# Altium PCB PCB2.PcbDoc
Units mil, origin at the board's own origin, x right, y up, seen from the top; angles counter-clockwise.
Board outline 3892.5 x 3160 mil, 2 copper layers (Top Layer, Bottom Layer); 68 components, 77 nets, 271 pads, 94 vias.
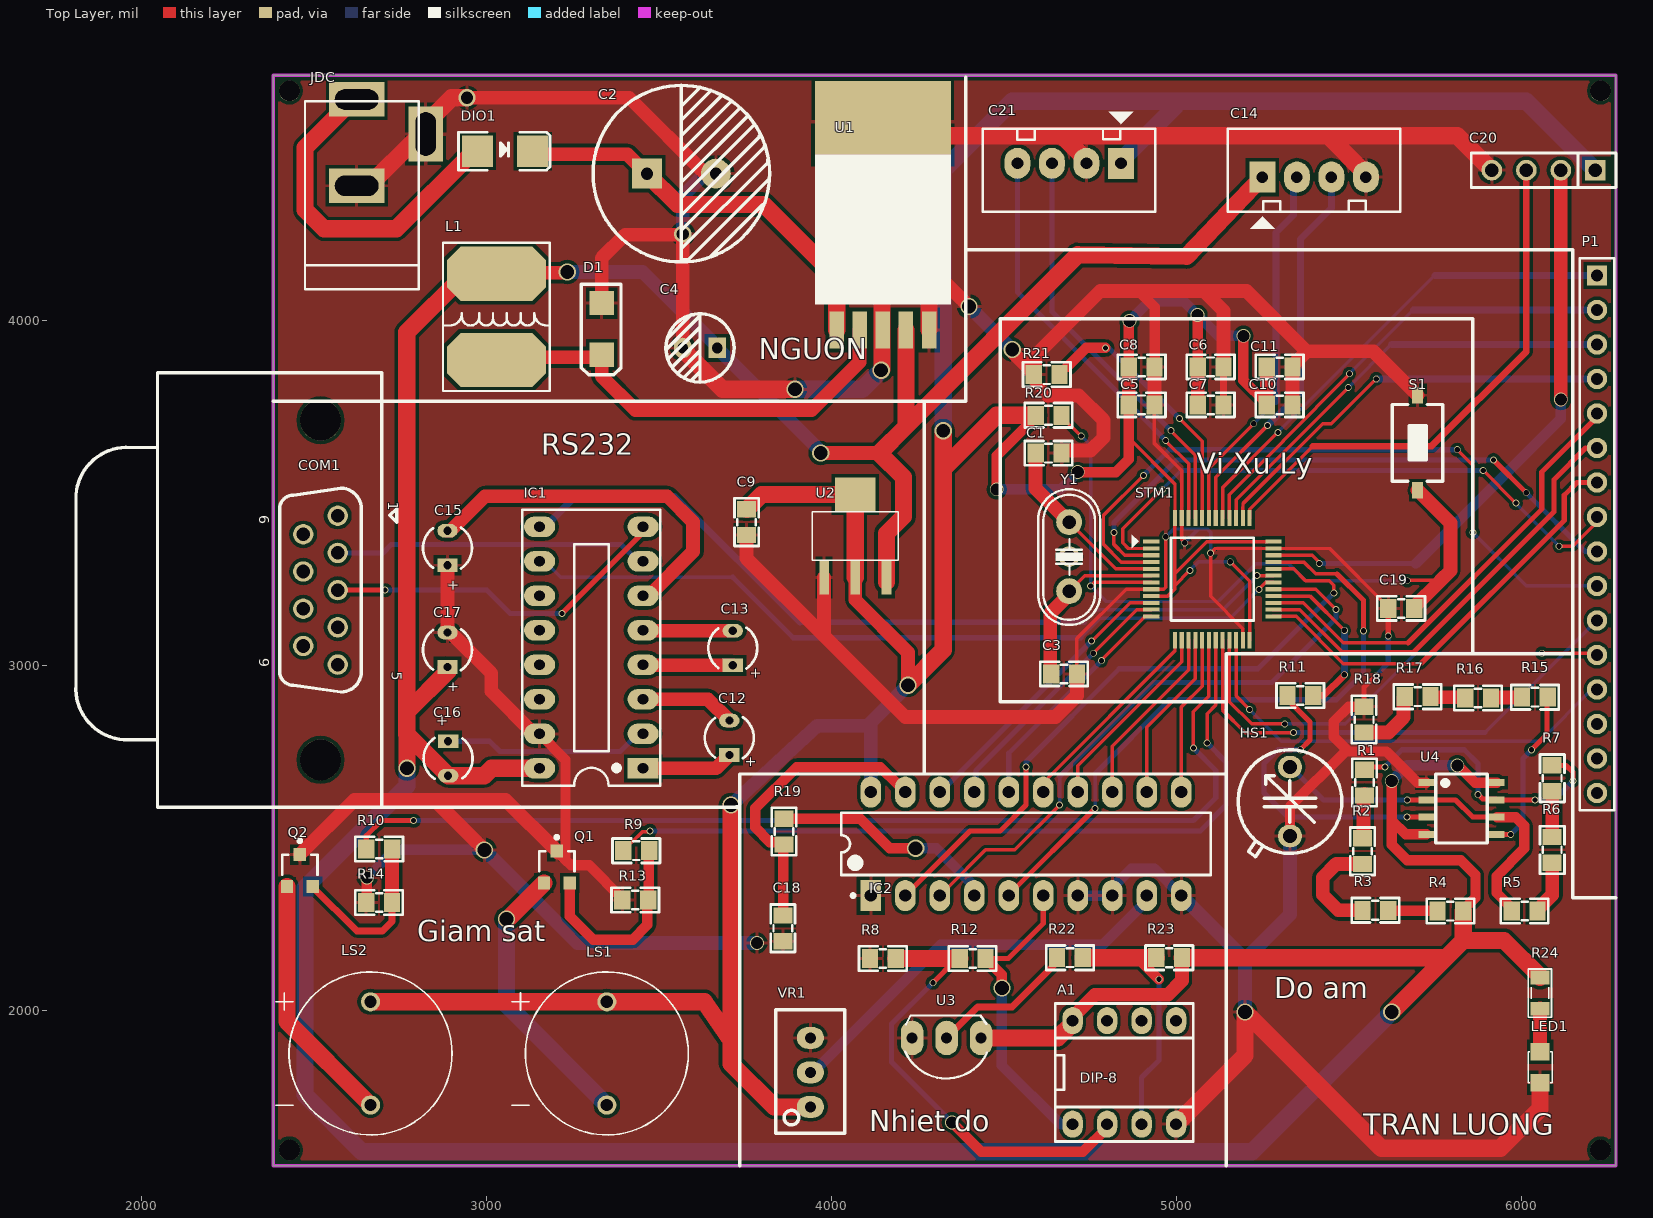
[diagram p0: Top Layer view]
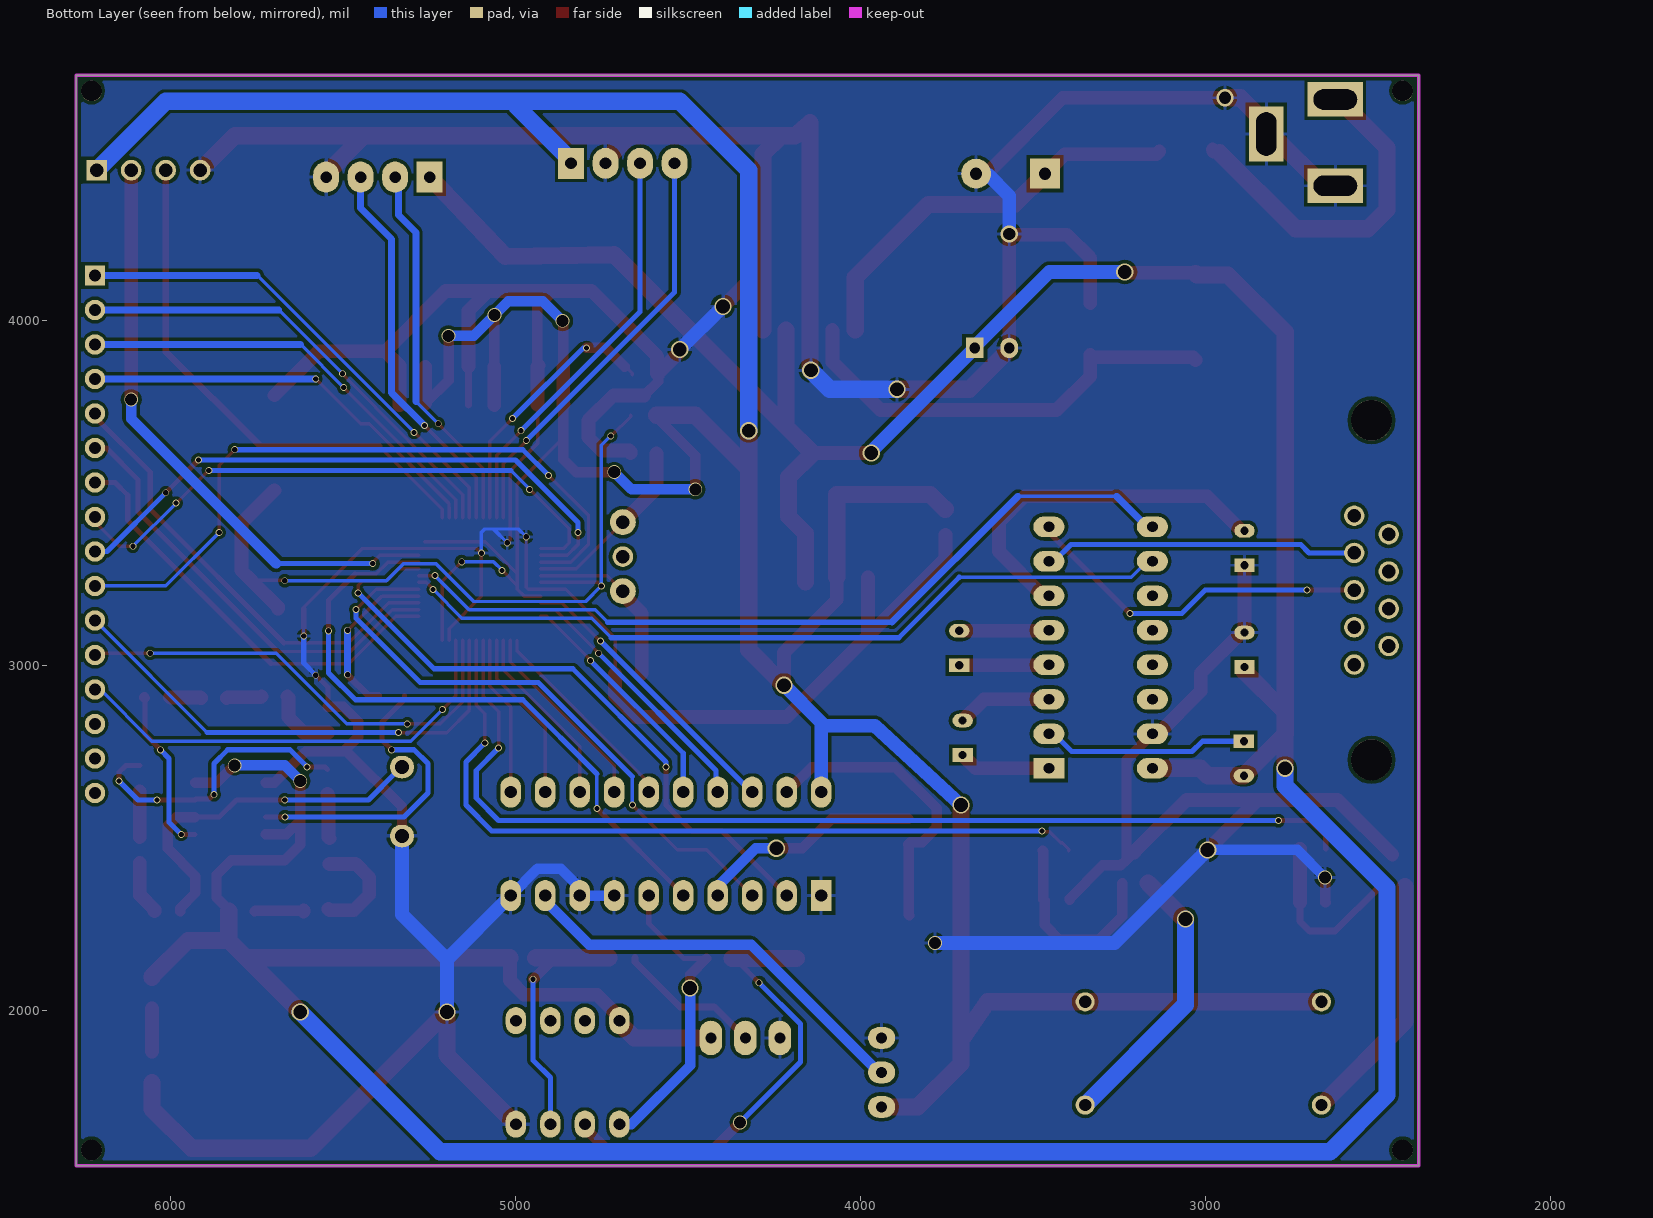
[diagram p1: Bottom Layer view, seen from below]
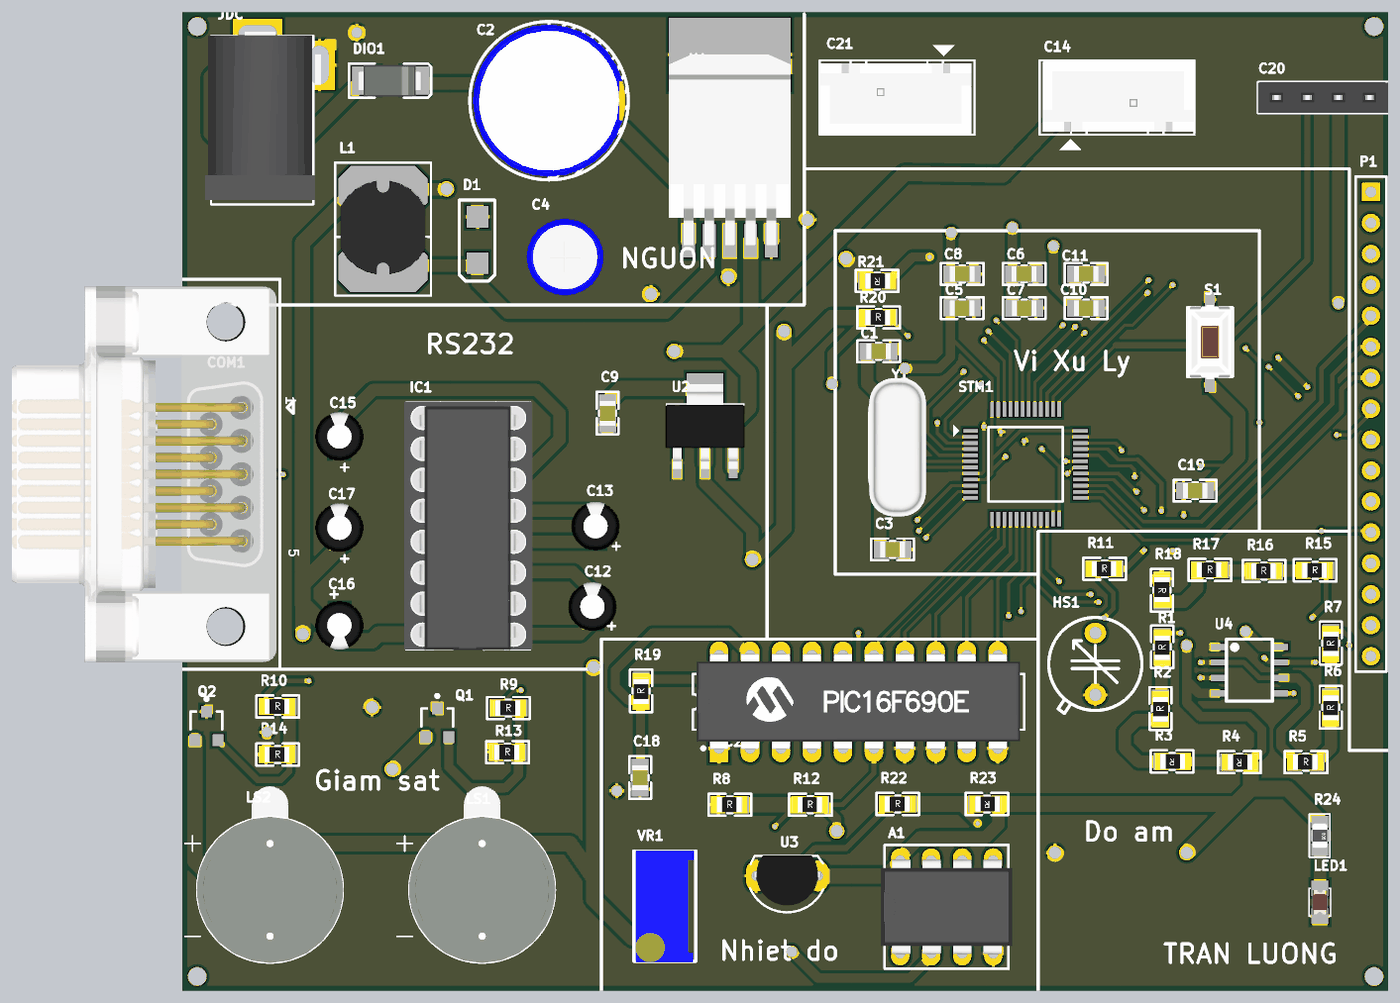
[diagram p2: 3D render of the assembled board from above, using the file's embedded part models]

## Layer stack, top to bottom
Top Solder: solder mask 0.4, Solder Resist, Dk 3.5
Top Layer: signal copper 1.4
Dielectric 1: dielectric 12.6, FR-4, Dk 4.8
Bottom Layer: signal copper 1.4
Bottom Solder: solder mask 0.4, Solder Resist, Dk 3.5

## Board outline
2382.5,1550 2382.5,4710 6275,4710 6275,1550

## Design rules (kind name [scope] priority, off if disabled: settings)
Clearance [All] p1: gap=10 ignorepadtopadclearanceinfootprint=TRUE
PolygonConnect [All] p1: connectstyle=Relief reliefconductorwidth=10 reliefentries=4 polygonreliefangle="90 Angle" airgapwidth=10
RoutingVias [All] p1: holewidth=35 width=40 viastyle="Through Hole" minholewidth=15 minwidth=20 maxholewidth=40 maxwidth=50
SolderMaskExpansion [All] p1: expansion=4
Width [All] p1: maxlimit=50 minlimit=15 preferedwidth=30
30 further rules are at their usual default settings.

## Components (designator, comment, footprint, x,y, rotation, side; value= is the part's Value field where it differs from the comment)
A1 "LM358 SOP8" DIP8 4850,1820 r0 top
C1 "22pF" "tu 0805" 4630,3615 r0 top
C2 "680uF" "tu hoa 13mm" 3566.1,4425 r0 top
C3 "22pF" "tu 0805" 4675,2975 r0 top
C4 "220uF" "Tu hoa 5mm" 3620,3920 r180 top
C5 "100pF" "Tu 0805" 4900,3755 r180 top
C6 "100pF" "Tu 0805" 5100,3865.13 r180 top
C7 "100pF" "Tu 0805" 5100,3755 r0 top
C8 "4.7uF" "Tu 0805" 4900,3865.13 r0 top
C9 "104" "tu 0805" 3755,3415 r270 top
C10 "1uF" "tu 0805" 5300,3755 r0 top
C11 "10nF" "tu 0805" 5300,3865.13 r0 top
C12 "10uF/50V" C3MM 3705,2790 r90 top
C13 "10uF/50V" C3MM 3715,3050 r90 top
C14 "JP4" Header4 5250,4415 r0 top
C15 "10uF/50V" C3MM 2888.01,3340 r90 top
C16 "10uF/50V" C3MM 2890,2730 r270 top
C17 "10uF/50V" C3MM 2888.01,3045 r90 top
C18 "150pF" "tu 0805" 3860.13,2237.77 r270 top
C19 "100nF" "tu 0805" 5652.23,3165 r0 top
C20 "JP4" JP4-C1T 6215,4435 r180 top
C21 "JP4" Header4 4840,4455 r180 top
COM1 "COM 9 FMALE" COM9A 2520,3217.87 r270 top value="COM 9"
D1 "Diode Zener" SMA 3335,3975 r90 top
DIO1 "Diode SMD" DIO-SMD-106 3055,4490 r180 top value=1N5007
HS1 "C1815 SOT23 TRANS NPN 0.15A 50V (SMD-HF)" "Cam Bien HS1101" 5330,2605 r90 top value="C?m Bi?n Ð? ?m HS1101"
IC1 "MAX232" DIP16/W0.3 3455,2701.38 r90 top
IC2 "ADC0804LCN" DIP20/W0.3 4565,2482.43 r0 top
JDC "3CELL_12V" DC-IN 2725,4515 r90 top
L1 "33uH" "Cuon Cam 7.5x7x5" 3030,3860 r0 top
LED1 "LED" LED-0805-Red 6055,1880 r270 top value="LED 3 ly Single Colour"
LS1 "BUZZER_T" XDCR_AI-1224-TWT-5V-R 3350,1875 r0 top
LS2 "BUZZER_T" XDCR_AI-1224-TWT-5V-R 2665,1875 r0 top
P1 "Header 16" HDR1X16 6220,4130 r270 top
Q1 "2N222" SOT23 3205,2415 r0 top value=C1815
Q2 "2N222" SOT23 2460,2405 r0 top value=C1815
R1 "9.1k" "Tro SMD 0805" 5543.62,2660 r90 top
R2 "6.8k" "Tro SMD 0805" 5537.61,2461.17 r90 top
R3 "10k" "Tro SMD 0805" 5577.77,2287.61 r180 top
R4 "24k" "tro smd 0805" 5795,2285 r180 top
R5 "270k" "tro smd 0805" 6010,2290 r0 top
R6 "270k" "tro smd 0805" 6087.61,2465 r90 top
R7 "36k" "tro smd 0805" 6087.61,2672.43 r90 top
R8 "10k" "tro smd 0805" 4150,2152.39 r0 top
R9 "1k" "tro smd 0805" 3435,2465 r0 top
R10 "1k" "tro smd 0805" 2690,2470 r0 top
R11 "1k" "tro smd 0805" 5360,2915 r0 top
R12 "10k" "tro smd 0805" 4410,2152.61 r0 top
R13 "10k" "tro smd 0805" 3432.23,2322.39 r0 top
R14 "10k" "tro smd 0805" 2689.65,2314.79 r0 top
R15 "360k" "Tro SMD 0805" 6040,2910 r0 top
R16 "360k" "Tro SMD 0805" 5875,2907.61 r0 top
R17 "150k" "Tro SMD 0805" 5700,2911.54 r0 top
R18 "39k" "tro smd 0805" 5547.39,2842.77 r270 top
R19 "10k" "tro smd 0805" 3860.74,2518.09 r90 top
R20 "10k" "tro smd 0805" 4630,3727.13 r0 top
R21 "100k" "tro smd 0805" 4625,3840 r180 top
R22 "10k" "tro smd 0805" 4692.23,2155 r0 top
R23 "10k" "tro smd 0805" 4980,2150 r180 top
R24 "1k" RES-SMD-0805 6055,2050 r270 top
S1 "SW-SMD" SW-SMD 5700,3645 r270 top
STM1 "STM32F103C8T6" QFP50P900X900X160-48N 5105,3250 r0 top
U1 "LM2596" TO263-5 4150,3973.07 r0 top
U2 "LM1117-ADJ" LM1117-SOP 4070,3305 r0 top
U3 "LM35" QTO-92 4335,1920 r180 top
U4 "MH001514" "sop 8" 5725,2460 r270 top value="NE555 SOP8"
VR1 "10k" VAR_RESISTOR 3940,1820 r90 top value="VR 10K"
Y1 "8MHz" "THACH ANH CAM" 4690,3315 r90 top

## Footprints (in the part's own frame and the unit in brackets; to place one, negate y for a bottom-side part, rotate by r counter-clockwise, add the part's x,y. Pads: shape width x height; smd on the part's side, far side on the other; paste and mask are expansions set on the pad)
C3MM [mm]
  rect 1x1.5 hole 0.6: 1(-1.27,0)
  oval 1x1.5 hole 0.6: 2(1.27,0)
  silkscreen extent -1.5,-1.81 1.5,1.8, body extent -2,-2.03 1.99,1.97, height 7.01
"Cam Bien HS1101" [mil]
  oval 65x70 hole 40: 1(-100,0) 2(100,0)
  silkscreen extent -160,-150 150,150
COM9A [mm] "D-SUB- 9P, MALE, RT ANGLE, TH"
  round 1.5 hole 1 unplated: 1(-5.48,1.27) 2(-2.74,1.27) 3(0,1.27) 4(2.74,1.27) 5(5.48,1.27) 6(-4.11,-1.27) 7(-1.37,-1.27) 8(1.37,-1.27) 9(4.11,-1.27)
  round 3 hole 3 unplated: 10(-12.5,0) 11(12.5,0)
  silkscreen extent -16,-18.01 16,5.6, body extent -15.4,-17.5 15.4,4.2, height 13.2
"Cuon Cam 7.5x7x5" [mm]
  oct 7.3x4 smd: 1(0,0.635) 2(0,6.985)
  silkscreen extent -3.94,-1.65 3.94,9.27, body extent -3.5,0.07 3.5,7.8, height 5.02
DC-IN [mil] "Jac DC input"
  rect 100x160 hole 59.06 slot 125.98 at 90 deg: 1(125,100) 2(-125,100)
  rect 160x100 hole 59.06 slot 125.98 at 0 deg: 3(25,-100)
  silkscreen extent -425,-80 120,250, body extent -410,-105 134,269, height 434
DIO-SMD-106 [mil]
  rect 90x90.55 smd: 1(80,0) 2(-80,0)
  silkscreen extent -130,-55 135,55, body extent -99,-50 106,52, height 95
DIP8 [mm] "W.300/L.400"
  oval 1.5x2 hole 0.864: 1(-3.81,-3.81) 2(-1.27,-3.81) 3(1.27,-3.81) 4(3.81,-3.81) 5(3.81,3.81) 6(1.27,3.81) 7(-1.27,3.81) 8(-3.81,3.81)
  silkscreen extent -5.08,-5.08 5.08,5.08, body extent -5.4,-3.88 5.4,3.88, height 4.5
DIP16/W0.3 [mil] "16 PIN, W 300mil, Pin to pin 100mil"
  rect 60x90 hole 31: 1(0,0)
  oval 60x90 hole 31: 2(100,0) 3(200,0) 4(300,0) 5(400,0) 6(500,0) 7(600,0) 8(700,0) 9(700,300) 10(600,300) 11(500,300) 12(400,300) 13(300,300) 14(200,300) 15(100,300) 16(0,300)
  silkscreen extent -50,-50 750,350, body extent -52,-57 752,356, height 299
DIP20/W0.3 [mil] "DIP, 20-Leads, Row Spacing 7.62mm, Pitch 2.54mm, Body 25.9x6.6mm"
  rect 60x90 hole 35.43: 1(-450,-150)
  oval 60x90 hole 35.43: 2(-350,-150) 3(-250,-150) 4(-150,-150) 5(-50,-150) 6(50,-150) 7(150,-150) 8(250,-150) 9(350,-150) 10(450,-150) 11(450,150) 12(350,150) 13(250,150) 14(150,150) 15(50,150) 16(-50,150) 17(-150,150) 18(-250,150) 19(-350,150) 20(-450,150)
  silkscreen extent -535,-155 535,90, body extent -522,-153 522,155, height 180
HDR1X16 [mm] "Connector; Header; 16 Position"
  rect 1.5x1.5 hole 0.9: 1(0,0)
  round 1.5 hole 0.9: 2(2.54,0) 3(5.08,0) 4(7.62,0) 5(10.16,0) 6(12.7,0) 7(15.24,0) 8(17.78,0) 9(20.32,0) 10(22.86,0) 11(25.4,0) 12(27.94,0) 13(30.48,0) 14(33.02,0) 15(35.56,0) 16(38.1,0)
  silkscreen extent -1.27,-1.27 39.37,1.27, body extent -1.27,-1.27 39.37,1.27, height 7
Header4 [mil] "CON4"
  rect 75x90 hole 34: 1(0,0)
  oval 75x90 hole 34: 2(100,0) 3(200,0) 4(300,0)
  silkscreen extent -100,-150 400,140, body extent -90,-90 398,136, height 276
JP4-C1T [mm] "4 row, straight, gold plating"
  rect 1.52x1.52 hole 1.02: 1(0,0)
  round 1.52 hole 1.02: 2(2.54,0) 3(5.08,0) 4(7.62,0)
  silkscreen extent -1.52,-1.27 9.14,1.27, body extent -1.52,-1.25 9.14,1.25, height 8.51
LED-0805-Red [mil]
  rect 50x55 smd: 1(0,0) 2(90,0)
  silkscreen extent 0,-35 90,35, body extent 5,-25 85,25, height 43
LM1117-SOP [mm]
  rect 0.7x2.54 smd: 1(-2.3,-1.27) 2(0,-1.27) 3(2.3,-1.27)
  rect 3x2.54 smd: 2(0,4.826)
  silkscreen extent -3.17,0 3.17,3.56, body extent -3.25,-1.78 3.25,5.18, height 1.68
QFP50P900X900X160-48N [mm] "QFP,0.50mm pitch,square;12 pin X 12 pin,7.00mm X 7.00mm X 1.60mm H body"
  rect 1.2x0.3 smd: 1(-4.5,2.75) 2(-4.5,2.25) 3(-4.5,1.75) 4(-4.5,1.25) 5(-4.5,0.75) 6(-4.5,0.25) 7(-4.5,-0.25) 8(-4.5,-0.75) 9(-4.5,-1.25) 10(-4.5,-1.75) 11(-4.5,-2.25) 12(-4.5,-2.75) 25(4.5,-2.75) 26(4.5,-2.25) 27(4.5,-1.75) 28(4.5,-1.25) 29(4.5,-0.75) 30(4.5,-0.25) 31(4.5,0.25) 32(4.5,0.75) 33(4.5,1.25) 34(4.5,1.75) 35(4.5,2.25) 36(4.5,2.75)
  rect 0.3x1.2 smd: 13(-2.75,-4.5) 14(-2.25,-4.5) 15(-1.75,-4.5) 16(-1.25,-4.5) 17(-0.75,-4.5) 18(-0.25,-4.5) 19(0.25,-4.5) 20(0.75,-4.5) 21(1.25,-4.5) 22(1.75,-4.5) 23(2.25,-4.5) 24(2.75,-4.5) 37(2.75,4.5) 38(2.25,4.5) 39(1.75,4.5) 40(1.25,4.5) 41(0.75,4.5) 42(0.25,4.5) 43(-0.25,4.5) 44(-0.75,4.5) 45(-1.25,4.5) 46(-1.75,4.5) 47(-2.25,4.5) 48(-2.75,4.5)
  silkscreen extent -5.94,-3.05 3.05,3.28, body extent -4.5,-4.5 4.5,4.5, height 1.42
QTO-92 [mil] "TO-92"
  oval 66x100 hole 32: 1(-100,0) 2(0,0) 3(100,0)
  silkscreen extent -117,-65 120,118, body extent -109,-66 109,95, height 245
RES-SMD-0805 [mil]
  rect 39.37x55 smd: 1(-45,0) 2(45,0)
  silkscreen extent -70,-34 70,33, body extent -39,-25 39,25, height 31
SMA [mil]
  rect 70x70 smd: 1(74.8,0) 2(-74.8,0)
  silkscreen extent -133,-56 129,59
"sop 8" [mil]
  rect 20x45 smd: 1(-200,0) 2(-150,0) 3(-100,0) 4(-50,0) 5(-50,205) 6(-100,205) 7(-150,205) 8(-200,205)
  silkscreen extent -225,28 -25,177
SOT23 [mm] "SOT-23; 3 Leads; Body 3.1 x 2.5 mm, inc. leads (LxW max), Alternate Lead Configuration"
  rect 0.9x0.95 smd: 1(0,1.175) 2(0.95,-1.175) 3(-0.95,-1.175)
  silkscreen extent -1.3,-0.3 1.3,2.32
SW-SMD [mm] "Switch SMD type"
  rect 1.2x0.8 smd: 1(-3.5,0) 2(3.5,0)
  silkscreen extent -2.82,-1.85 2.82,1.85, body extent -3.05,-1.85 3.05,1.85, height 2.5
"THACH ANH CAM" [mm] "Footpin for Crystal 2 pin"
  round 1.524 hole 1: 0(0,0)
  round 1.905 hole 1: 1(-2.54,0) 2(2.54,0)
  silkscreen extent -5.03,-2.29 4.96,2.29, body extent -5.93,-2.36 5.42,2.29, height 3.5
TO263-5 [mm] "LM2576-SMD"
  rect 1.07x2.75 smd: 1(-3.4,-0.025) 2(-1.7,-0.025) 3(0,-0.025) 4(1.7,-0.025) 5(3.4,-0.025)
  rect 10x6 smd: 1(0,15.289)
  silkscreen extent -5,1.85 5,12.88, body extent -5,-0.38 5,15.29, height 4.79
"Tro SMD 0805" [mm]
  rect 1.2x1.4 smd: 1(-0.946,-0.061) 2(0.954,-0.061)
  silkscreen extent -1.75,-0.97 1.75,0.84, body extent -1.56,-0.76 1.44,0.64, height 0.53
"tro smd 0805" [mm]
  rect 1.2x1.4 smd: 1(-0.946,-0.061) 2(0.954,-0.061)
  silkscreen extent -1.75,-0.97 1.75,0.84, body extent -1.56,-0.76 1.44,0.64, height 0.53
"tu 0805" [mm] "Compoment SMD 80x50mil"
  rect 1.2x1.4 smd: 1(-0.946,-0.003) 2(0.954,-0.003)
  silkscreen extent -1.75,-0.89 1.75,0.89, body extent -1.01,-0.64 1.01,0.63, height 0.61
"Tu 0805" [mm] "Compoment SMD 80x50mil"
  rect 1.2x1.4 smd: 1(-0.946,-0.003) 2(0.954,-0.003)
  silkscreen extent -1.75,-0.89 1.75,0.89, body extent -1.01,-0.64 1.01,0.63, height 0.61
"Tu hoa 5mm" [mm]
  rect 1.3x1.5 hole 0.8: 1(-1.27,0)
  oval 1.3x1.5 hole 0.8: 2(1.27,0)
  silkscreen extent -2.51,-2.51 2.51,2.51, body extent -3.12,-3.18 3.23,3.18, height 14.55
"tu hoa 13mm" [mm]
  rect 2.2x2.2 hole 0.9: 1(-2.54,0)
  round 2.2 hole 0.9: 2(2.54,0)
  silkscreen extent -6.5,-6.5 6.5,6.5, body extent -6.25,-6.25 6.26,6.25, height 23.02
VAR_RESISTOR [mm]
  oval 1.6x2 hole 0.8: 1(-2.54,0) 2(0,0) 3(2.54,0)
  silkscreen extent -4.47,-2.54 4.6,2.54, body extent -4.54,-2.4 4.66,2.4, height 12.02
XDCR_AI-1224-TWT-5V-R [mm]
  round 1.408 hole 0.9: N(0,-3.8) P(0,3.8)
  silkscreen extent -6.98,-6 6,6, body extent -6,-6 6,8.5, height 13

## Part data
A1: library part LM358, "Dán", Chung_Loai=Dán, Don_Vi=Con, Ma_Hang=MH000609, Ten_Linh_Kien="LM358 SOP8"
C1 C3: library part "Tu 0805 22pF 50V 10%", "Dán", Chung_Loai=Dán, Don_Vi=Con, Ma_Hang=MH004560, So_Chan=2, Ten_Linh_Kien="T? 0805 22P 10% 50V"
C2: library part "Tu Hoa 680uF 25V 13x17", "C?m", Chung_Loai=C?m, Don_Vi=Con, Ma_Hang=MH005082, So_Chan=2, Ten_Linh_Kien="T? Hóa 680uF 25V"
C4: library part "Tu Hoa 220uF 16V 6x11", "C?m", Chung_Loai=C?m, Don_Vi=Con, Ma_Hang=MH001348, So_Chan=2, Ten_Linh_Kien="T? Hóa 220uF 16V 6x11MM"
C5 C6 C7 C8: library part "Tu 0805 200pF 50V 10%", "Dán", Chung_Loai=Dán, Don_Vi=Con, Ma_Hang=MH008100, So_Chan=2, Ten_Linh_Kien="T? 0805 200p 10% 50V"
C9: library part "Tu 0805 104 50V 10%", "Dán", Chung_Loai=Dán, Don_Vi=Con, Ma_Hang=MH004551, So_Chan=2, Ten_Linh_Kien="T? 0805 104-100nF 10% 50V"
C10 C11 C19: library part "Tu 0805 474 50V 10%", "Dán", Chung_Loai=Dán, Don_Vi=Con, Ma_Hang=MH006116, So_Chan=2, Ten_Linh_Kien="T? 0805 474-470nF 50V 10%"
C12 C13 C15 C16 C17: library part "Cap Pol", "Polarized Capacitor (Axial)", LatestRevisionDate=17-Jul-2002, LatestRevisionNote="Re-released for DXP Platform.", PackageReference=POLAR0.8, Published=8-Jun-2000, Publisher="Altium Limited"
C14 C20 C21: "WR-PHD 2.54 mm Angled Socket Header", Manufacturer="W¨¹rth Elektronik eiSos GmbH", partNo=613004143121, ComponentLink1 Description=Manufacturer, ComponentLink1URL=http://www.we-online.com, ComponentLink2 Description=Datasheet, ComponentLink2URL=http://katalog.we-online.de/em/datasheet/6130xx143121.pdf, Created by="Karrer Zheng", Created Date="29 March 2013", NoPins=04
C18: library part "Tu 0805 220nF 50V 10%", "Dán", Chung_Loai=Dán, Don_Vi=Con, Ma_Hang=MH008099, So_Chan=2, Ten_Linh_Kien="T? 0805 220nF 50V 10%"
COM1: library part COM9F, "COM 9", PackageDocument=O, DatasheetDocument=1-Sep-1999, Gender=Receptacle, LatestRevisionDate=17-Jul-2002, LatestRevisionNote="Re-released for DXP Platform.", Orientation="Right Angle", PackageReference=788750, Positions=9, Published=15-Jun-2001, Publisher="Altium Limited"
D1: "Zener Diode", LatestRevisionDate=17-Jul-2002, LatestRevisionNote="Re-released for DXP Platform.", PackageReference=DIODE-0.7, Published=8-Jun-2000, Publisher="Altium Limited"
DIO1: "Default Diode", Code - JEDEC=DO-214-AB, Published=8-Jun-2000, Publisher="Altium Limited", Revision="July-2002: Re-released for DXP Platform."
HS1: library part "Cam Bien HS1101", "C?m"
IC1: "Dual EIA-232 Driver/Receiver"
IC2: library part ADC0804, "C?m", Chung_Loai=C?m, Don_Vi=Con, Ma_Hang=MH002626, Ten_Linh_Kien="ADC0804LCN DIP20"
JDC: library part Jac_DC, "C?m", Chung_Loai=C?m, Don_Vi=Con, Ma_Hang=MH000923, Ten_Linh_Kien="Jack DC5.5x2.1MM DC5501"
L1: library part "CUON CAM 47uH_ SMD", "Dán", Chung_Loai=Dán, Don_Vi=Con, Ma_Hang=MH004211, Ten_Linh_Kien="Cu?n C?m 47uH 7x7x4MM CD74R"
LED1: "LED Single colour Green and Red"
LS1 LS2: library part AI-1224-TWT-5V-R, "AUDIO INDICATOR 5VDC 30MA 85DB", Package="PUI Audio, Inc.", Availability="In Stock", Check_prices=https://www.snapeda.com/parts/AI-1224-TWT-5V-R/PUI%20Audio,%20Inc./view-part/5873694/?ref=eda, MF="PUI Audio, Inc.", MP=AI-1224-TWT-5V-R, Price=None, Purchase-URL=https://pricing.snapeda.com/search/part/AI-1224-TWT-5V-R/?ref=eda, SnapEDA_Link=https://www.snapeda.com/parts/AI-1224-TWT-5V-R/PUI%20Audio,%20Inc./view-part/5873694/?ref=snap
P1: "Header, 16-Pin", LatestRevisionDate=17-Jul-2002, LatestRevisionNote="Re-released for DXP Platform.", Publisher="Altium Limited"
Q1 Q2: "NPN 600mW, ECB", =C2383
R1 R2 R3 R15 R16 R17: library part "Tro 0805 5% 270k", "Dán", Chung_Loai=Dán, Don_Vi=Con, Ma_Hang=MH005333, So_Chan=2, Ten_Linh_Kien="Tr? 0805 5% 270k"
R4 R18: library part "Tro 0805 5% 1M", "Dán", Chung_Loai=Dán, Don_Vi=Con, Ma_Hang=MH005235, So_Chan=2, Ten_Linh_Kien="Tr? 0805 5% 1M"
R5 R6 R7: library part "Tro 0805 1% 15k", "Dán", Chung_Loai=Dán, Don_Vi=Con, Ma_Hang=MH005476, So_Chan=2, Ten_Linh_Kien="Tr? 0805 1% 15k"
R8 R12 R19 R22 R23: library part "Tro 0805 5% 10k", "Dán", Chung_Loai=Dán, Don_Vi=Con, Ma_Hang=MH005239, So_Chan=2, Ten_Linh_Kien="Tr? 0805 5% 10k"
R9 R10 R11 R20 R21: library part "Tro 0805 1% 1k", "Dán", Chung_Loai=Dán, Don_Vi=Con, Ma_Hang=MH005468, So_Chan=2, Ten_Linh_Kien="Tr? 0805 1% 1k"
R13 R14: library part "Tro 0805 1% 10k", "Dán", Chung_Loai=Dán, Don_Vi=Con, Ma_Hang=MH005473, So_Chan=2, Ten_Linh_Kien="Tr? 0805 1% 10k"
R24: library part "Resistor - SMD", "Resistor", Manufacturer="Generic Components", Class=Passive, Published=08/06/2000, Publisher="Altium Hobart Technology Centre"
S1: "Switch", LatestRevisionDate=17-Jul-2002, LatestRevisionNote="Re-released for DXP Platform.", PackageReference=SPST-2, Published=24-Mar-1999, Publisher="Altium Limited"
STM1: "Dán", Chung_Loai=Dán, Don_Vi=Con, Ma_Hang=MH000567, Ten_Linh_Kien=STM32F103C8T6
U1: Max Input Voltage="12 V", Max Output Current="3 (6.0 peak) A", Max Output Voltage=mV, Temperature Range="-40 to +125 degC", Category=IC-Power, Min Input Voltage=mV, Min Output Voltage=mV, Mounting Technology="Surface Mount", Status=Unreleased, Supply Voltage=mV
U2: "800mA Low-Dropout Linear Regulator", Creator="Nguyen Ba Bien", Website=http://group3i.net
U3: "Teminal"
U4: library part NE555, "Dán"
VR1: library part VR, "Var Resistor"
Y1: library part XTAL, "Crystal Oscillator", LatestRevisionDate=17-Jul-2002, LatestRevisionNote="Re-released for DXP Platform.", PackageReference=R38, Published=8-Jun-2000, Publisher="Altium Limited"

## Free pads (board coordinates)
  round 60 hole 60: 2(2430,4665) 3(6230,4665) 4(6230,1595) 5(2430,1595)

## Via types
v1: diameter 20, hole 15, Top Layer to Bottom Layer, 65 vias
v2: diameter 50, hole 40, Top Layer to Bottom Layer, 16 vias
v3: diameter 40, hole 35, Top Layer to Bottom Layer, 11 vias
v4: diameter 50, hole 35, Top Layer to Bottom Layer, 2 vias

## Nets (pads, with @x,y where several pads share a name; then routed paths per layer and width w, separated by ;. In a path a pad name is that pad's centre, name@x,y a point inside that pad or via, vN(x,y) a via of type N, cw(c..) or ccw(c..) an arc to the next point about the centre after c; other vN are vias at no path point)
+3V3: C5.2 C6.2 C7.1 C8.1 C9.1 C10.1 C11.1 C20.1 C21.1 IC2.20 LS1.P LS2.P R20.1 STM1.9 STM1.24 STM1.36 STM1.48 U2.2 VR1.1 | length 11492.6
  Top Layer w10: 4862.43,3659.31 4996.73,3525 STM1.48 ; STM1.9 4975.79,3200.79 4995.51,3220.51 4995.51,3230.51 ; STM1.48@4995.51,3427.17 4995.51,3265.51 ; v1(5040,3275) 4995.51,3230.51 ; v1(5156.81,3300) 5213.27,3243.54 STM1.24 ; STM1.36@5264.45,3358.27 5088.27,3358.27 4995.51,3265.51 ; 4995.51,3230.51 4995.51,3265.51
  Top Layer w30: v3(4480,3510) 4479.74,3510.26 4479.74,3607.77 4592.77,3720.8 R20.1 ; v3(4715,3560) 4825,3560 4862.43,3597.43 4862.43,3659.31 C5.2 ; C8.1 4862.77,3996.2 v3(4865,3998.43) ; v3(5062.15,4015.28) 5062.29,4015.14 5062.29,3865.41 C6.2 ; v3(5195,3955) 5195,3826.57 5262.77,3758.8 C10.1
  Top Layer w40: U2.2@4070,3255 4070,3190 4222.68,3037.32 v2(4222.68,2942.32) ; C5.2 4862.6,3755.31 4862.6,3864.83 C8.1 ; C6.2 5062.77,3864.92 C7.1 ; C10.1@5262.77,3758.8 C11.1
  Top Layer w50: LS2.P LS1.P 3632.99,2024.61 3710,1913.22 ; v2(3710,2595) 3710,1913.22 ; C9.1 3756.05,3452.23 3798.82,3495 4070,3495 U2.2@4070,3255 ; VR1.1 3835,1720 3710,1845 3710,1913.22 ; v2(4222.68,2942.32) 4325,3044.65 4325,3570 ; v2(4325,3680) 4325,3570 ; R20.1 4479.74,3724.74 4325,3570
  Bottom Layer w10: v1(5040,3275) 5065,3300 v1(5156.81,3300)
  Bottom Layer w30: v3(4480,3510) 4665,3510 v3(4715,3560) ; v3(4865,3998.43) 4921.57,4055 5022.43,4055 v3(5062.15,4015.28) 5122.43,3955 v3(5195,3955)
  Bottom Layer w40: v2(3710,2595) 3960,2825 4115,2825 ; IC2.20 4115,2825 ; v2(4222.68,2942.32) 4115,2834.65 4115,2825
  Bottom Layer w50: v2(4325,3680) 4325,4435 4525,4635 5000,4635 ; C21.1 4840,4462.5 5000,4622.5 5000,4635 ; C20.1 6015,4635 5000,4635
+5V: A1.8 C4.1 C14.1 C16.2 C17.1 IC1.16 L1.2 R4.1 R23.1 R24.1 U1.4 U2.3 U3.1 U4.4 U4.8 | length 13403.5
  Top Layer w30: v3(5625,2665) 5625,2550 ; U4.4 5665,2510 5625,2550 ; v3(5815,2710) 5816.92,2710 5866.92,2660 U4.8 ; R4.1 5832.23,2291.33 5867.57,2326.68 5867.57,2392.43 5825,2435 5670,2435 5625,2480 5625,2550
  Top Layer w40: L1.2 3033.09,4138.09 3233.09,4138.09 v2(3235,4140) ; v2(3970,3615) 4139.8,3615 ; A1.8@4700,1979.84 4765.16,2045 4976.2,2045 5017.23,2086.03 R23.1
  Top Layer w50: 2770,2800 2770,3965 2936.3,4131.3 3026.3,4131.3 L1.2 ; v2(2770.79,2701.38) 2770.79,2800 ; C17.1@2883.48,2990.47 2890,2983.95 2770.79,2864.74 2770.79,2800 ; IC1.16 3015.91,2701.38 2994.53,2680 C16.2 2890,2680.79 2770.79,2800 ; U2.3@4160.55,3241.22 U2.3 4160.55,3382.07 4210,3431.52 4210,3544.8 4139.8,3615 4216.93,3692.13 ; U1.4 4216.93,3692.13 ; U3.1 4657.39,1920 4700,1962.61 A1.8 A1.8@4700,1979.84 ; R23.1 5782.39,2152.39 ; C14.1 5030,4185 4714.8,4190 4216.93,3692.13 ; v2(5625,1995) 5782.39,2152.39 ; R4.1 5832.23,2202.23 ; R24.1 6055,2097.82 5950.59,2202.23 5832.23,2202.23 ; 5782.39,2152.39 5832.23,2202.23
  Bottom Layer w30: v3(5625,2665) 5670,2710 v3(5815,2710)
  Bottom Layer w40: v2(3235,4140) 3453.94,4140 3670,3923.94 C4.1 3970,3620 v2(3970,3615)
  Bottom Layer w50: v2(2770.79,2701.38) 2770.79,2650.79 2475,2355 2475,1755 2640,1590 5220,1590 v2(5625,1995)
ADC0: IC2.18 STM1.10 | length 840.1
  Top Layer w10: v1(4755,3070) 4755.47,3070 4866.57,3181.1 STM1.10
  Bottom Layer w10: IC2.18 IC2.18@4317.43,2632.43
  Bottom Layer w15: IC2.18@4317.43,2632.43 v1(4755,3070)
ADC1: IC2.17 STM1.11 | length 765.7
  Top Layer w10: v1(4760,3035) 4886.42,3161.42 STM1.11
  Bottom Layer w10: IC2.17 IC2.17@4420.13,2637.56
  Bottom Layer w15: IC2.17@4420.13,2637.56 4420.13,2695.13 v1(4760,3035)
ADC2: IC2.16 STM1.12 | length 690.6
  Top Layer w10: v1(4783.39,3013.39) 4783.39,3015 STM1.12@4910,3141.61 ; STM1.12@4910,3141.73 STM1.12
  Bottom Layer w15: IC2.16 4515,2745 v1(4783.39,3013.39)
ADC3: IC2.15 STM1.13 | length 598.5
  Top Layer w10: IC2.15 4615,2660 4996.73,3041.73 STM1.13
ADC4: IC2.14 STM1.14 | length 565.3
  Top Layer w10: IC2.14 4715,2709.39 5016.42,3010.81 STM1.14
ADC5: IC2.13 STM1.15 | length 532
  Top Layer w10: IC2.13 4815,2765.52 5036.1,2986.62 STM1.15
ADC6: IC2.12 STM1.16 | length 498.7
  Top Layer w10: IC2.12 4915,2820 5055.79,2960.79 STM1.16
ADC7: IC2.11 STM1.17 | length 465.5
  Top Layer w10: IC2.11 5015,2879.21 5075.47,2939.68 STM1.17
BUZZER_H: R10.1 STM1.18 | length 3049.2
  Top Layer w10: v1(5050,2760) 5050,2865 5095.16,2910.16 STM1.18
  Top Layer w15: R10.1 2652.77,2505.86 2696.91,2550 v1(2790,2550)
  Bottom Layer w15: v1(2790,2550) 5050,2550 5115,2615 5115,2695 v1(5050,2760)
BUZZER_T: R9.1 STM1.19 | length 2315.3
  Top Layer w10: R9.1 3397.77,2466.54 3416.39,2485.17 3420.33,2485.17 3453.25,2518.09 3473.09,2518.09 v1(3475,2520) ; v1(5090,2775) 5090,2860.16 5114.84,2885 STM1.19
  Bottom Layer w15: v1(3475,2520) 5070,2520 5145,2595 5145,2720 v1(5090,2775)
GND: A1.4 C1.2 C2.2 C3.2 C4.2 C5.1 C6.1 C7.2 C8.2 C9.2 C10.2 C11.2 C14.4 C15.1 C17.2 C18.2 C19.1 C20.4 C21.2 D1.1 HS1.1 IC1.15 IC2.1 IC2.7 IC2.8 IC2.10 JDC.2 JDC.3 LED1.2 Q1.1 Q2.1 R8.1 R13.1 R14.1 R18.1 R21.2 S1.1 STM1.8 STM1.23 STM1.35 STM1.47 U1.1@4150,4575 U1.3 U1.5 U2.1 U3.3 U4.1 VR1.3 | length 20640.1
  Top Layer w10: C3.2 4712.57,3077.57 4855.47,3220.47 STM1.8 4964.14,3220.47 4970,3226.33 v1(4970,3372.43) ; C5.1 4937.23,3642.77 5016.42,3563.58 STM1.47 5016.42,3363.58 v1(5025,3355) ; STM1.23 5193.58,3106.42 5100,3200 v1(5100,3325) 5113.58,3338.58 STM1.35 5445.22,3338.58 5615,3168.8 C19.1
  Top Layer w15: R18.1 5545,2936.25 v1(5580,2971.25) ; v1(5615,3085) C19.1
  Top Layer w20: C6.1 5137.4,3865.09 5137.4,3755.04 C7.2 ; C11.2 C11.2@5337.57,3868.94
  Top Layer w30: R14.1 2653.71,2313.68 2653.71,2383.71 v3(2655,2385) ; IC1.15 3230,2726.38 3230,2436.26 ; Q1.1 Q1.1@3208.7,2457.56 ; Q1.1@3207.72,2457.56 Q1.1@3208.7,2457.56 ; R13.1 3395,2323.94 3298.94,2420 3246.26,2420 3230,2436.26 ; R21.2 4587.43,3822.57 4627.7,3782.3 ; 4890,4085 4937.57,4037.43 C8.2 ; HS1.1 5330,2590 5490,2750 5500,2750 ; R18.1 5500,2880 5457.13,2837.13 5457.13,2792.87 5500,2750 ; U4.1 5700,2660 5610,2750 5500,2750 ; Q1.1@3208.7,2457.56 3230,2436.26
  Top Layer w40: Q2.1 2618.74,2610 2850,2610 ; C15.1 C17.2 2897.22,3095 3015,2977.22 3015,2925 3138.62,2801.38 IC1.15 ; v4(2945,4645) 3415,4645 3635,4425 C2.2 ; v2(2995,2465) 2850,2610 ; Q1.1@3205,2460.28 Q1.1@3207.72,2457.56 ; Q1.1 3056.26,2610 2850,2610 ; D1.1 3335,4180 3403.09,4248.09 3568.09,4248.09 v4(3570,4250) C4.2 ; C9.2 3754.87,3310.13 3979.45,3085.55 ; U2.1 3979.45,3085.55 ; 4283.86,4156.14 v2(4400,4040) ; v2(4525,3915) 4526.91,3913.09 4526.91,3906.84 4587.43,3846.33 R21.2 4591.05,3846.02 4591.05,3896.05 4780,4085 4890,4085 5080,4085 ; 4627.7,3782.3 4717.7,3782.3 4789.53,3710.47 4789.53,3659.53 4752.43,3622.43 4671.2,3622.43 4667.57,3618.8 C1.2 ; C3.2 4712.57,2912.57 4650,2850 4215,2850 3979.45,3085.55 ; C8.2@4933.95,3868.62 C8.2@4937.4,3865.17 ; C5.1 4937.4,3755.31 C8.2@4937.4,3865.17 ; C8.2 C8.2@4937.4,3865.17 ; C6.1 5137.23,4027.77 5080,4085 ; C10.2 C11.2 ; C11.2@5337.57,3868.94 5378.64,3910 ; S1.1 5699.37,3782.8 5572.17,3910 5378.64,3910 ; 5080,4085 5203.64,4085 5378.64,3910
  Top Layer w50: JDC.2 2660,4390 2802.5,4532.5 2825,4510 JDC.3 2825,4570 2900,4645 v4(2945,4645) ; C4.2 3570,3915.74 3605.58,3880.16 3605.58,3879.8 3685.38,3800 v2(3895,3800) ; v2(4145,3855) 4147.79,3857.79 4147.79,4572.52 4190,4535 U1.1@4230.75,4535 ; U1.5 4283.86,4156.14 4283.86,4481.89 U1.1@4230.75,4535 ; C21.2 4740,4465.03 4670.03,4535 ; A1.4 5200,1870 v2(5200,1995) 5595,1600 5940,1600 6055,1715 LED1.2 ; C14.4 5550,4425.03 5440.03,4535 ; C20.4 5815,4535 5440.03,4535 ; U1.1@4230.75,4535 4670.03,4535 ; 4670.03,4535 5440.03,4535
  Bottom Layer w10: v1(4970,3372.43) 4992.57,3395 5065,3395 ; v1(5025,3355) 5065,3395 ; v1(5100,3325) 5100,3385 5090,3395 5065,3395
  Bottom Layer w15: v1(5580,2971.25) 5615,3006.25 v1(5615,3085)
  Bottom Layer w30: v3(2655,2385) 2735,2465 v2(2995,2465) ; IC2.7 IC2.8 4815,2355 4870,2410 4937.43,2410 IC2.10
  Bottom Layer w40: JDC.3@2800,4540 JDC.3@2820,4540 ; v4@2940,4645 v4(2945,4645) ; v2(2995,2465) 3265,2195 v3(3785,2195) ; IC1.15@3134.59,2801.38 IC1.15 ; v4(3570,4250) 3570,4360 C2.2@3635,4425 ; v2(4400,4040) v2(4525,3915) ; IC2.10 5200,2147.43 ; v2(5200,1995) 5200,2147.43 ; HS1.1 5330,2277.43 5200,2147.43
  Bottom Layer w50: v2(3895,3800) 4090,3800 v2(4145,3855)
GPS_RX: C14.2 STM1.43 | length 1093.4
  Top Layer w10: STM1.43 5095.16,3570.16 v1(5225,3700)
  Bottom Layer w10: v1(5225,3700) 5290,3765 ; C14.2@5340,4405 C14.2
  Bottom Layer w20: 5290,3765 5290,4255 5340,4305 C14.2@5340,4405
GPS_TX: C14.3 STM1.42 | length 1126.8
  Top Layer w10: STM1.42 5114.84,3545 5264.84,3695 v1(5265,3695)
  Bottom Layer w20: v1(5265,3695) 5360,3790 5360,4235 5450,4325 C14.3
HS1101_counter: R11.2 STM1.28 | length 490.1
  Top Layer w10: STM1.28 5388.09,3200.79 v1(5487.5,3101.38)
  Top Layer w20: R11.2 5427.61,2912.61 v1(5487.5,2972.5)
  Bottom Layer w20: v1(5487.5,2972.5) v1(5487.5,3101.38)
I2C_SCL: C21.3 STM1.45 | length 1201.4
  Top Layer w10: v1@4983.64,3680 v1(4985,3680) 5055.79,3609.21 STM1.45
  Bottom Layer w15: C21.3 4640,4025 v1(4985,3680)
I2C_SDA: C21.4 STM1.46 | length 1233.3
  Top Layer w10: v1(4970,3651.46) 4970,3650 5036.1,3583.9 STM1.46
  Bottom Layer w15: C21.4 4540,4081.46 v1(4970,3651.46)
INTR_ADC: IC2.5 STM1.33 | length 1872.7
  Top Layer w10: IC2.5 IC2.5@4515,2335 ; STM1.33 5370.79,3299.21 5405,3265 5466.46,3265
  Top Layer w15: IC2.5@4515,2335 v1(4765,2585) ; 5466.46,3265 5543.01,3188.45 v1(5543.01,3100)
  Bottom Layer w10: v1(4765,2585) 4765,2685
  Bottom Layer w15: 4765,2685 4980,2900 5465,2900 5543.01,2978.01 v1(5543.01,3100)
MCU_BOOT: R21.1 STM1.44 | length 784.8
  Top Layer w10: R21.1 4662.23,3846.33 4680.85,3864.95 R21.1@4684.79,3864.95 ; v1(5010,3715) 5075.47,3649.53 STM1.44
  Top Layer w30: R21.1@4684.79,3864.95 4739.83,3920 v1(4795,3920)
  Bottom Layer w10: v1(4795,3920) 4805,3920 ; v1@5007.29,3715 v1(5010,3715)
  Bottom Layer w15: 4805,3920 v1(5010,3715)
MCU_RESET: C19.2 R20.2 S1.2 STM1.7 | length 2234.6
  Top Layer w10: R20.2 4667.57,3720.8 4723.38,3665 v1(4725,3665) ; v1(4752.43,3230) 4762.58,3240.16 STM1.7 ; v1(5670,3245) 5672,3247 5768,3247
  Top Layer w40: C19.2 5689.8,3168.8 5766,3245 ; S1.2 5700.63,3507.2 5795,3412.83 5795,3274 5768,3247
  Bottom Layer w10: v1(4725,3665) 4752.43,3637.57 v1(4752.43,3230) 4797.43,3185 5122.43,3185 5232.43,3295 5325,3295 5375,3245 v1(5670,3245)
NetA1_2: A1.2 R8.2 R12.1 | length 1344.7
  Top Layer w15: v1(4295,2080) 4362.44,2147.44 R12.1@4370,2147.44 ; R12.1@4371.61,2147.44 R12.1@4370,2147.44 ; R12.1@4372.67,2150.11 R12.1@4370,2147.44
  Top Layer w30: v3(4350,1675) 4435,1590 4729.84,1590 4800,1660.16 A1.2
  Top Layer w50: R8.2 4187.68,2150.11 R12.1@4372.67,2150.11
  Bottom Layer w15: v1(4295,2080) 4175,1960 4175,1850 v3(4350,1675)
NetA1_3: A1.3 R22.2 R23.2 | length 740.8
  Top Layer w30: 4890,2152.5 4890,2150 v1(4950,2090)
  Top Layer w50: R22.2 4729.91,2152.5 4890,2152.5 4942.32,2152.5 R23.2
  Bottom Layer w15: A1.3 4900,1805 4950,1855 v1(4950,2090)
NetC2_1: C2.1 DIO1.2 U1.1@4016.14,3972.07 | length 1184.6
  Top Layer w40: DIO1.2 3143.9,4481.1 3410,4481.1 C2.1
  Top Layer w50: C2.1 3555.12,4335.98 3804.02,4335.98 4016.14,4123.86 U1.1@4016.14,3972.07
NetC12_1: C12.1 IC1.1 | length 266
  Top Layer w40: IC1.1 3666.38,2701.38 C12.1
NetC12_2: C12.2 IC1.3 | length 275.4
  Top Layer w40: IC1.3 3643.62,2901.38 C12.2
NetC13_1: C13.1 IC1.4 | length 260.6
  Top Layer w40: IC1.4 3456.06,3000.31 3714.69,3000.31 C13.1
NetC13_2: C13.2 IC1.5 | length 260.6
  Top Layer w40: IC1.5 3456.06,3100.31 3714.69,3100.31 C13.2
NetC15_2: C15.2 IC1.6 | length 1067.8
  Top Layer w40: C15.2 2897.22,3390 2997.22,3490 3525,3490 3600,3415 3600,3330 3471.38,3201.38 IC1.6
NetC16_1: C16.1 IC1.2 | length 598.7
  Bottom Layer w15: C16.1 3010,2780 3040,2750 3388.62,2750 3440,2801.38 IC1.2
NetC18_1: C18.1 IC2.19 R19.1 | length 884.6
  Top Layer w30: C18.1 3861.57,2276.57 3861.57,2479.29 R19.1 3856.57,2487.43 3822.57,2487.43 3780,2530 3780,2585.2 3899.8,2705 4142.43,2705 4194.26,2653.17 4201.14,2653.17 4215,2639.31 IC2.19
NetCOM1_2: COM1.2 IC1.7 | length 915.2
  Bottom Layer w15: COM1.2 2700.75,3325.75 2725,3350 3391.38,3350 3440,3301.38 IC1.7
NetCOM1_3: COM1.3 IC1.8 | length 1026.8
  Top Layer w15: COM1.3 v1(2707.13,3217.87) ; v1(3220,3150) 3455,3385 IC1.8
  Bottom Layer w15: v1(2707.13,3217.87) 3002.13,3217.87 3070,3150 v1(3220,3150)
NetD1_2: D1.2 L1.1 U1.2 | length 1312.4
  Top Layer w40: L1.1 3037.6,3892.6 3327.4,3892.6 D1.2 3335,3837.8 3432.8,3740 3943.2,3740 4082.01,3878.8 4082.01,3971.01 U1.2
NetDIO1_1: DIO1.1 JDC.1 | length 1012.2
  Top Layer w40: DIO1.1@2960.63,4485.63 2975.29,4488.53 2978.86,4489.24 DIO1.1@2980,4495
  Top Layer w50: JDC.1 2615,4640 2475,4500 2475,4320 2530,4265 2740,4265 DIO1.1@2960.63,4485.63
NetHS1_2: HS1.2 R5.1 U4.2 U4.6 | length 1062.8
  Top Layer w15: v1(5670,2610) U4.2 5810,2610 5860,2560 U4.6
  Top Layer w30: U4.6 5984,2560 6009.17,2534.83 6009.17,2469.17 5929.17,2389.17 5929.17,2340 5972.77,2296.4 R5.1
  Bottom Layer w15: HS1.2 5345,2705 5345,2685 5348.67,2688.67 5348.83,2688.67 5427.5,2610 v1(5670,2610)
NetIC2_4: IC2.4 R19.2 | length 660.5
  Top Layer w30: R19.2 4084.34,2555.66 4170,2470 v2(4245,2470)
  Bottom Layer w30: v2(4245,2470) 4305,2470 4415,2360 IC2.4
NetLED1_1: LED1.1 R24.2 | length 125
  Top Layer w40: LED1.1 R24.2
NetLS1_N: LS1.N Q1.3 | length 811.1
  Top Layer w50: v2(3059.43,2265) 3063.86,2265 Q1.3
  Bottom Layer w50: v2(3059.43,2265) 3059.43,2015.96 LS1.N
NetLS2_N: LS2.N Q2.3 | length 733.8
  Top Layer w50: Q2.3 2422.6,1967.8 LS2.N
NetQ1_2: Q1.2 R9.2 R13.2 | length 584.1
  Top Layer w30: Q1.2 3242.4,2272.6 3310,2205 3425,2205 3467.44,2247.44 3467.44,2317.64 R13.2 3471.19,2321.39 3471.19,2461.22 R9.2
NetQ2_2: Q2.2 R10.2 R14.2 | length 505.5
  Top Layer w15: Q2.2@2497.4,2357.76 Q2.2
  Top Layer w20: Q2.2@2497.4,2357.76 2625.16,2230 2700,2230 2727.23,2257.23 R14.2
  Top Layer w40: R14.2 2727.4,2312.57 2727.4,2467.43 R10.2
NetR1_1: R1.1 R2.2 | length 131.5
  Top Layer w40: R2.2 5543.01,2501.75 5543.01,2619.76 R1.1 R1.1@5546.02,2627.77
NetR1_2: R1.2 R7.2 U4.7 | length 856.6
  Top Layer w15: R1.2 5553.44,2705 v1(5605,2705) ; v1(5875,2625) 5876.35,2625 5888.85,2612.5 5927.5,2612.5 U4.7 v1(6040,2610) ; R7.2 6130,2710 6150,2690 v1(6150,2665)
  Bottom Layer w15: v1(5605,2705) 5655,2755 5835,2755 5875,2715 v1(5875,2625) ; v1(6040,2610) 6095,2610 v1(6150,2665)
NetR2_1: R2.1 R3.2 | length 319.8
  Top Layer w40: R2.1 5463.94,2423.94 5425,2385 5425,2335 5470,2290 R3.2 R3.2@5543.62,2293.43
NetR3_1: R3.1 R4.2 | length 147.4
  Top Layer w30: R3.1 5616.3,2288.7 5756.12,2288.7 R4.2
  Top Layer w40: R3.1@5615,2286.06 R3.1
NetR5_2: R5.2 R6.1 | length 157.7
  Top Layer w40: R5.2 6047.57,2291.54 6090,2333.97 R6.1
NetR6_2: R6.2 R7.1 | length 132.6
  Top Layer w40: R6.2 R7.1
NetR11_1: R11.1 U4.3 | length 901.9
  Top Layer w15: R11.1 5322.77,2900.81 5388.09,2835.49 5388.09,2783.09 v1(5360,2755) ; v1(5669.38,2560.62) 5670,2560 U4.3
  Bottom Layer w15: v1(5360,2755) 5295,2755 5255,2715 5255,2630 5324.38,2560.62 v1(5669.38,2560.62)
NetR15_1: R15.1 R16.2 | length 91.2
  Top Layer w40: R16.2 5913.77,2906.41 6001.57,2906.41 R15.1
NetR15_2: R15.2 U4.5 | length 483.5
  Top Layer w15: U4.5 v1(5970,2510) ; v1(6030,2755) 6075.05,2800.05 R15.2@6075.05,2905.08
  Top Layer w30: R15.2@6075.05,2905.08 R15.2
  Bottom Layer w15: v1@5970.96,2509.04 v1(5970,2510) 6005,2545 6005,2730 v1(6030,2755)
NetR16_1: R16.1 R17.2 | length 101.8
  Top Layer w40: R17.2 5739.54,2907.18 5835.8,2907.18 R16.1
NetR17_1: R17.1 R18.2 | length 194.3
  Top Layer w40: R18.2 5615.2,2805.2 5659.15,2849.15 5659.15,2905.53 R17.1 R17.1@5662.44,2909.48
NetR22_1: R22.1 U3.2 | length 425.6
  Top Layer w20: U3.2 4335,1923.2 4358.56,1946.76 4361.76,1946.76 4425,2010 4525,2010 4655,2140 R22.1
OSC_IN: C1.1 STM1.5 Y1.2 | length 534.1
  Top Layer w10: Y1.2 4825.47,3279.53 STM1.5
  Top Layer w40: C1.1 4592.77,3512.23 Y1.2
OSC_OUT: C3.1 STM1.6 Y1.1 | length 520.5
  Top Layer w10: Y1.1 4734.84,3259.84 STM1.6
  Top Layer w40: C3.1 4635,2977.64 4635,3150.53 4690,3205.53 Y1.1
PA15: P1.4 STM1.38 | length 1222.5
  Top Layer w10: STM1.38 5193.58,3458.22 5193.9,3458.54 5193.9,3468.9 5425,3700 5450,3700 v1(5580,3830)
  Bottom Layer w20: v1(5580,3830) P1.4@6225,3830
PB2: P1.11 STM1.20 | length 1449.6
  Top Layer w10: STM1.20 5134.53,2870.47 5200,2805 v1(5340.47,2805)
  Bottom Layer w10: 5895,2805 P1.11
  Bottom Layer w15: v1(5340.47,2805) 5895,2805
PB3: P1.3 STM1.39 | length 1285.3
  Top Layer w10: STM1.39 5173.9,3480 v1(5498.9,3805)
  Bottom Layer w10: v1(5498.9,3805) 5623.9,3930
  Bottom Layer w20: 5623.9,3930 P1.3
PB4: P1.2 STM1.40 | length 1361.4
  Top Layer w10: STM1.40 5154.21,3494.21 5310,3650 5310,3651.46 5502.23,3843.69 v1(5502.23,3845)
  Bottom Layer w10: v1(5502.23,3845) 5687.23,4030
  Bottom Layer w20: 5687.23,4030 P1.2@6225,4030
PB5: P1.1 STM1.41 | length 1432.8
  Top Layer w10: STM1.41 5134.53,3514.53 v1(5295,3675)
  Bottom Layer w10: v1(5295,3675) 5750,4130
  Bottom Layer w20: 5750,4130 P1.1@6225,4130
PB10: P1.12 STM1.21 | length 1357.7
  Top Layer w10: STM1.21 5154.21,2894.68 5218.9,2830 v1(5315,2830) ; v1(6060,3035) 6215,3035 P1.12
  Bottom Layer w10: v1(5315,2830) 5490,2830 5695,3035 v1(6060,3035)
PB11: P1.13 STM1.22 | length 1327
  Top Layer w10: STM1.22 5173.9,2911.1 v1(5213.27,2871.73) v1@5215.97,2871.73
  Bottom Layer w10: v1(5213.27,2871.73) 5305,2780 6055,2780 6205,2930 P1.13
PB12: P1.7 STM1.25 | length 1254.7
  Top Layer w10: STM1.25 5348.27,3141.73 5485,3005 5710,3005
  Top Layer w15: 5710,3005 6125,3420 6125,3493 6162,3530 P1.7
PB13: P1.6 STM1.26 | length 1287
  Top Layer w10: STM1.26 5358.58,3161.42 5480,3040 5690,3040 ; 6187,3630 P1.6
  Top Layer w15: 5690,3040 6095,3445 6095,3538 6187,3630
PB14: P1.5 STM1.27 | length 1330.2
  Top Layer w10: STM1.27 5368.9,3181.1 5485,3065 5672.43,3065 ; P1.5@6220,3720 P1.5
  Top Layer w15: 5672.43,3065 6060,3452.57 6060,3560 P1.5@6220,3720
PC13: P1.8 STM1.2 | length 1716.7
  Top Layer w10: STM1.2 4861.42,3338.58 4845,3355 4845,3395.52 4959.48,3510 v1(4960,3510) ; v1(5890,3565) v1(5985,3470) ; v1(6110,3345) 6150,3345 P1.8@6235,3430
  Bottom Layer w10: v1(4960,3510) 5015,3565 ; v1(5985,3470) v1(6110,3345)
  Bottom Layer w15: 5015,3565 v1(5890,3565)
PC14: P1.9 STM1.3 | length 1774.7
  Top Layer w10: v1(4819.84,3385) 4819.84,3350.16 4851.1,3318.9 STM1.3
  Top Layer w15: v1(5920,3595) v1(6015,3500)
  Bottom Layer w10: P1.9 P1.9@6225,3330
  Bottom Layer w15: v1(4819.84,3385) 4819.84,3414.06 5000.79,3595 v1(5920,3595) ; v1(6015,3500) 6185,3330 P1.9
PC15: P1.10 STM1.4 | length 2030.8
  Top Layer w10: v1(4905,3550) 4789.53,3434.53 4789.53,3350.47 4840.79,3299.21 STM1.4 ; v1(5815,3625) 5860,3580 v1(5860,3385)
  Bottom Layer w10: v1(5860,3385) 6015,3230 P1.10
  Bottom Layer w15: v1(4905,3550) 4980,3625 v1(5815,3625)
RD_ADC: IC2.2 STM1.32 | length 1896
  Top Layer w10: STM1.32 5340.47,3279.53 5375,3245 5443.58,3245 5457.13,3231.46 v1(5457.13,3210)
  Top Layer w15: IC2.2 4215,2333.9 4238.1,2356.99 4239.57,2356.99 4402.57,2520 4490,2520 4565,2595 v1(4565,2705)
  Bottom Layer w15: v1(4565,2705) 4565,2720 4835,2990 5237.13,2990 v1(5457.13,3210)
RXD: IC1.9 STM1.31 | length 2371
  Top Layer w10: v1(5234.49,3260) 5234.65,3259.84 STM1.31
  Bottom Layer w10: IC1.9 IC1.9@3170,3401.38 ; 3258.62,3490 3545,3490 ; 4733.58,3125 4770,3161.42 5135.91,3161.42 v1(5234.49,3260)
  Bottom Layer w15: 3910,3125 4733.58,3125
  Bottom Layer w20: IC1.9@3170,3401.38 3258.62,3490 ; 3545,3490 3910,3125
SWCLK: C20.3 STM1.37 | length 1541.5
  Top Layer w10: STM1.37 5213.27,3452.36 5395.9,3635
  Top Layer w20: 5395.9,3635 5740,3635 6015,3910 C20.3
SWDIO: C20.2 STM1.34 | length 1728.9
  Top Layer w10: STM1.34 5394.8,3318.9 5415,3298.7 v1(5415,3295)
  Top Layer w40: v3(6115,3770) C20.2@6115,4425
  Bottom Layer w15: v1(5415,3295) 5695,3295
  Bottom Layer w30: 5695,3295 6115,3715 v3(6115,3770)
TXD: IC1.10 STM1.30 | length 2285.2
  Top Layer w10: v1(5240,3220) 5260.16,3240.16 STM1.30
  Bottom Layer w10: IC1.10 3170,3301.38 3216.38,3255 3715,3255 ; 4723.58,3080 4780,3136.42 5156.42,3136.42 v1(5240,3220)
  Bottom Layer w15: 3715,3255 3890,3080 4723.58,3080
V_OUT_LM358: A1.1 IC2.6 R12.2 | length 895.5
  Top Layer w15: R12.2 4513.64,2150.21 4615,2251.57 IC2.6
  Top Layer w30: R12.2 4495,2102.79 v2(4495,2065)
  Bottom Layer w30: v2(4495,2065) 4495,1840 4665,1670 A1.1
VREF/2: IC2.9 VR1.2 | length 1196
  Bottom Layer w30: VR1.2 3947.87,1820 4317.87,2190 4787.57,2190 4915,2317.43 IC2.9
WR_ADC: IC2.3 STM1.29 | length 1761.5
  Top Layer w10: IC2.3 4315,2333.9 4338.1,2356.99 4339.57,2356.99 4447.57,2465 4532.23,2465 v1(4662.23,2595) ; STM1.29 5404.53,3220.47 v1(5463.58,3161.42)
  Bottom Layer w10: v1(4662.23,2595) 4662.23,2677.23
  Bottom Layer w15: 4662.23,2677.23 4935,2950 5277.17,2950 5463.58,3136.42 v1(5463.58,3161.42)
pads on no net: A1.5 A1.6 A1.7 COM1.1 COM1.4 COM1.5 COM1.6 COM1.7 COM1.8 COM1.9 COM1.10 COM1.11 IC1.11 IC1.12 IC1.13 IC1.14 P1.14 P1.15 P1.16 STM1.1 Y1.0

## Polygon pours and split planes (outlines as drawn)
GND on Bottom Layer "Bottom Layer-GND" (solid, pour order 22): 2382.5,4710 6275,4710 6275,1550 2382.5,1550
no net on Bottom Layer "Bottom Layer-No Net" (solid, pour order 8): 3845,3895
no net on Top Overlay (solid): 2382.5,4710 6275,4710
GND on Top Layer "Top Layer-GND" (solid, pour order 20): 6260,4710 6265,4705 6270,4710 6275,4710 6275,1550 2382.5,1550 2382.5,4710
no net on Top Layer "Top Layer-No Net" (solid, pour order 18): 2382.5,4710

## Keep-outs
Keep-Out Layer:
  the board outline again, w10

## Silkscreen, mask and mechanical layers (free items; w line width, h text height)
Top Overlay:
  lines w10: 2382.5,3765 4390,3765 4390,4705 ; 2385,2587.95 3735,2587.95 3735,1550 ; 3725,2590 3735,2590 3735,2685 5145,2685 5145,1550 ; 4250,3765 4255,3765 ; 4270,2685 4270,3765 4285,3765 ; 4390,4205 6150,4205 6150,2325.61 6275,2325.61 ; 5140,2895 5091.17,2895 4490,2895 4490,3970 4490,4005 5860,4005 5860,3090 5860,3033.75 ; 5145,2095 5145,3033.75 6150,3033.75 6150,3055
  text "NGUON" at 3790,3887 h60
  text "RS232" at 3160,3610 h60
  text "Vi Xu Ly" at 5060,3555 h60
  text "Giam sat" at 2800,2200 h60
  text "Do am" at 5285,2035 h60
  text "Nhiet do" at 4110,1650 h60
  text "TRAN LUONG" at 5543.01,1640 h60

## Text inside footprints (layer, text, board x,y; h text height)
A1: Top Overlay "DIP-8" at 4720,1790 h30
C12: Top Overlay "+" at 3780,2702.38 h30 r90
C13: Top Overlay "+" at 3795,2960 h30 r90
C15: Top Overlay "+" at 2918.01,3215 h30 r90
C16: Top Overlay "+" at 2860,2855 h30 r270
C17: Top Overlay "+" at 2918.01,2920 h30 r90
COM1: Top Overlay "1" at 2716.85,3473.78 h30 r270; Top Overlay "5" at 2726.69,2981.65 h30 r270; Top Overlay "9" at 2342.83,3021.02 h30 r270; Top Overlay "6" at 2342.83,3434.41 h30 r270